# Altium PCB 404_PCB.PcbDoc
Units mm, origin at the board's own origin, x right, y up, seen from the top; angles counter-clockwise.
Board outline 150 x 150 mm, 4 copper layers (Top Layer, Plane(VCC), Plane(GROUND), Bottom Layer), stack 0.995 mm thick; 81 components, 119 nets, 430 pads, 21 vias.
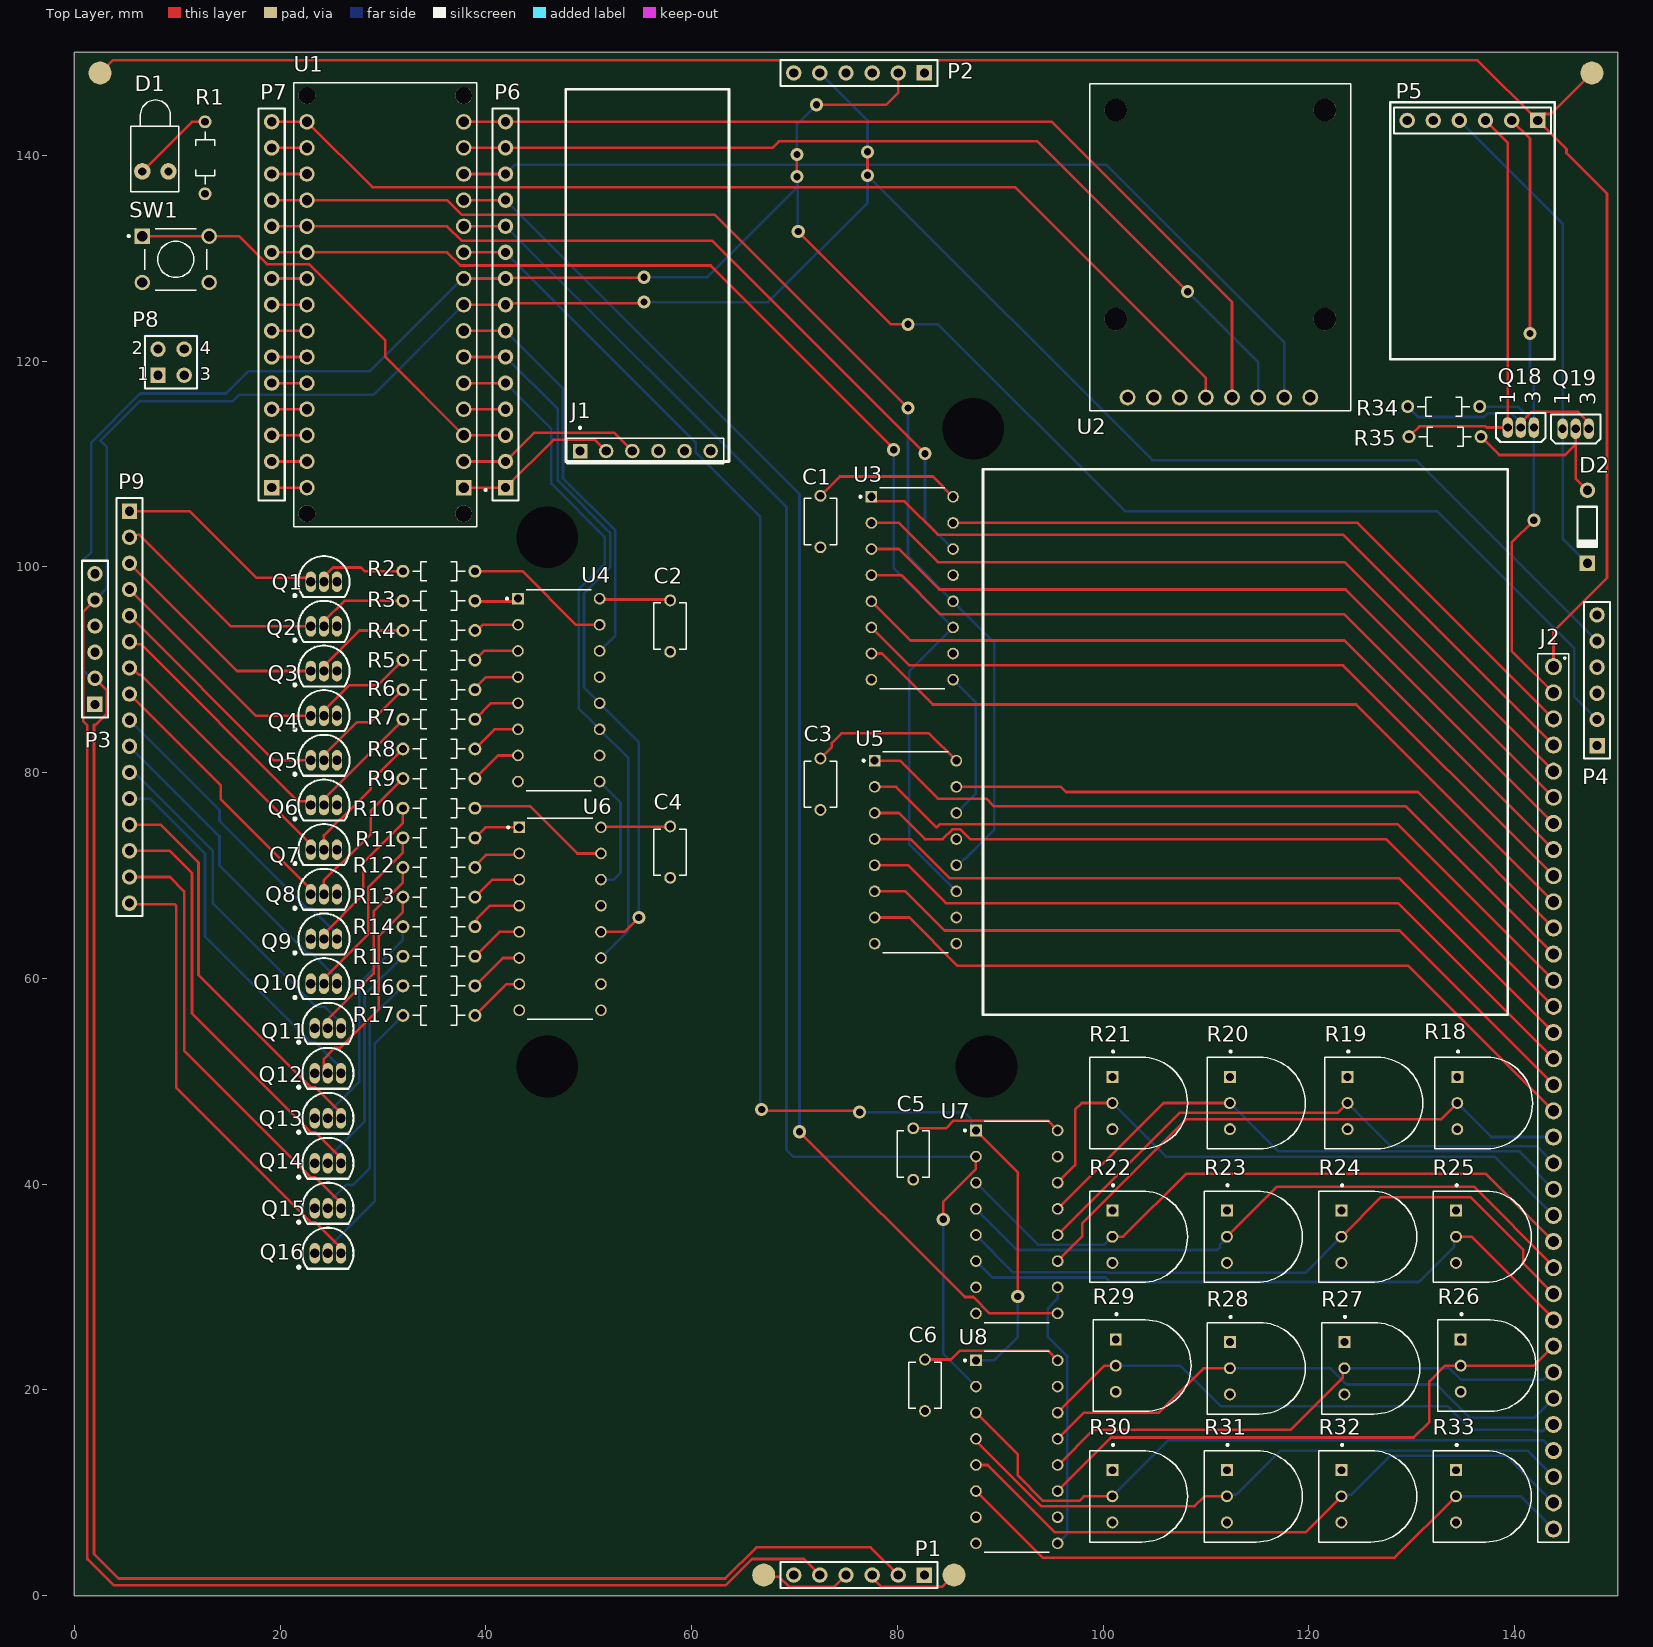
[diagram p0: Top Layer view]
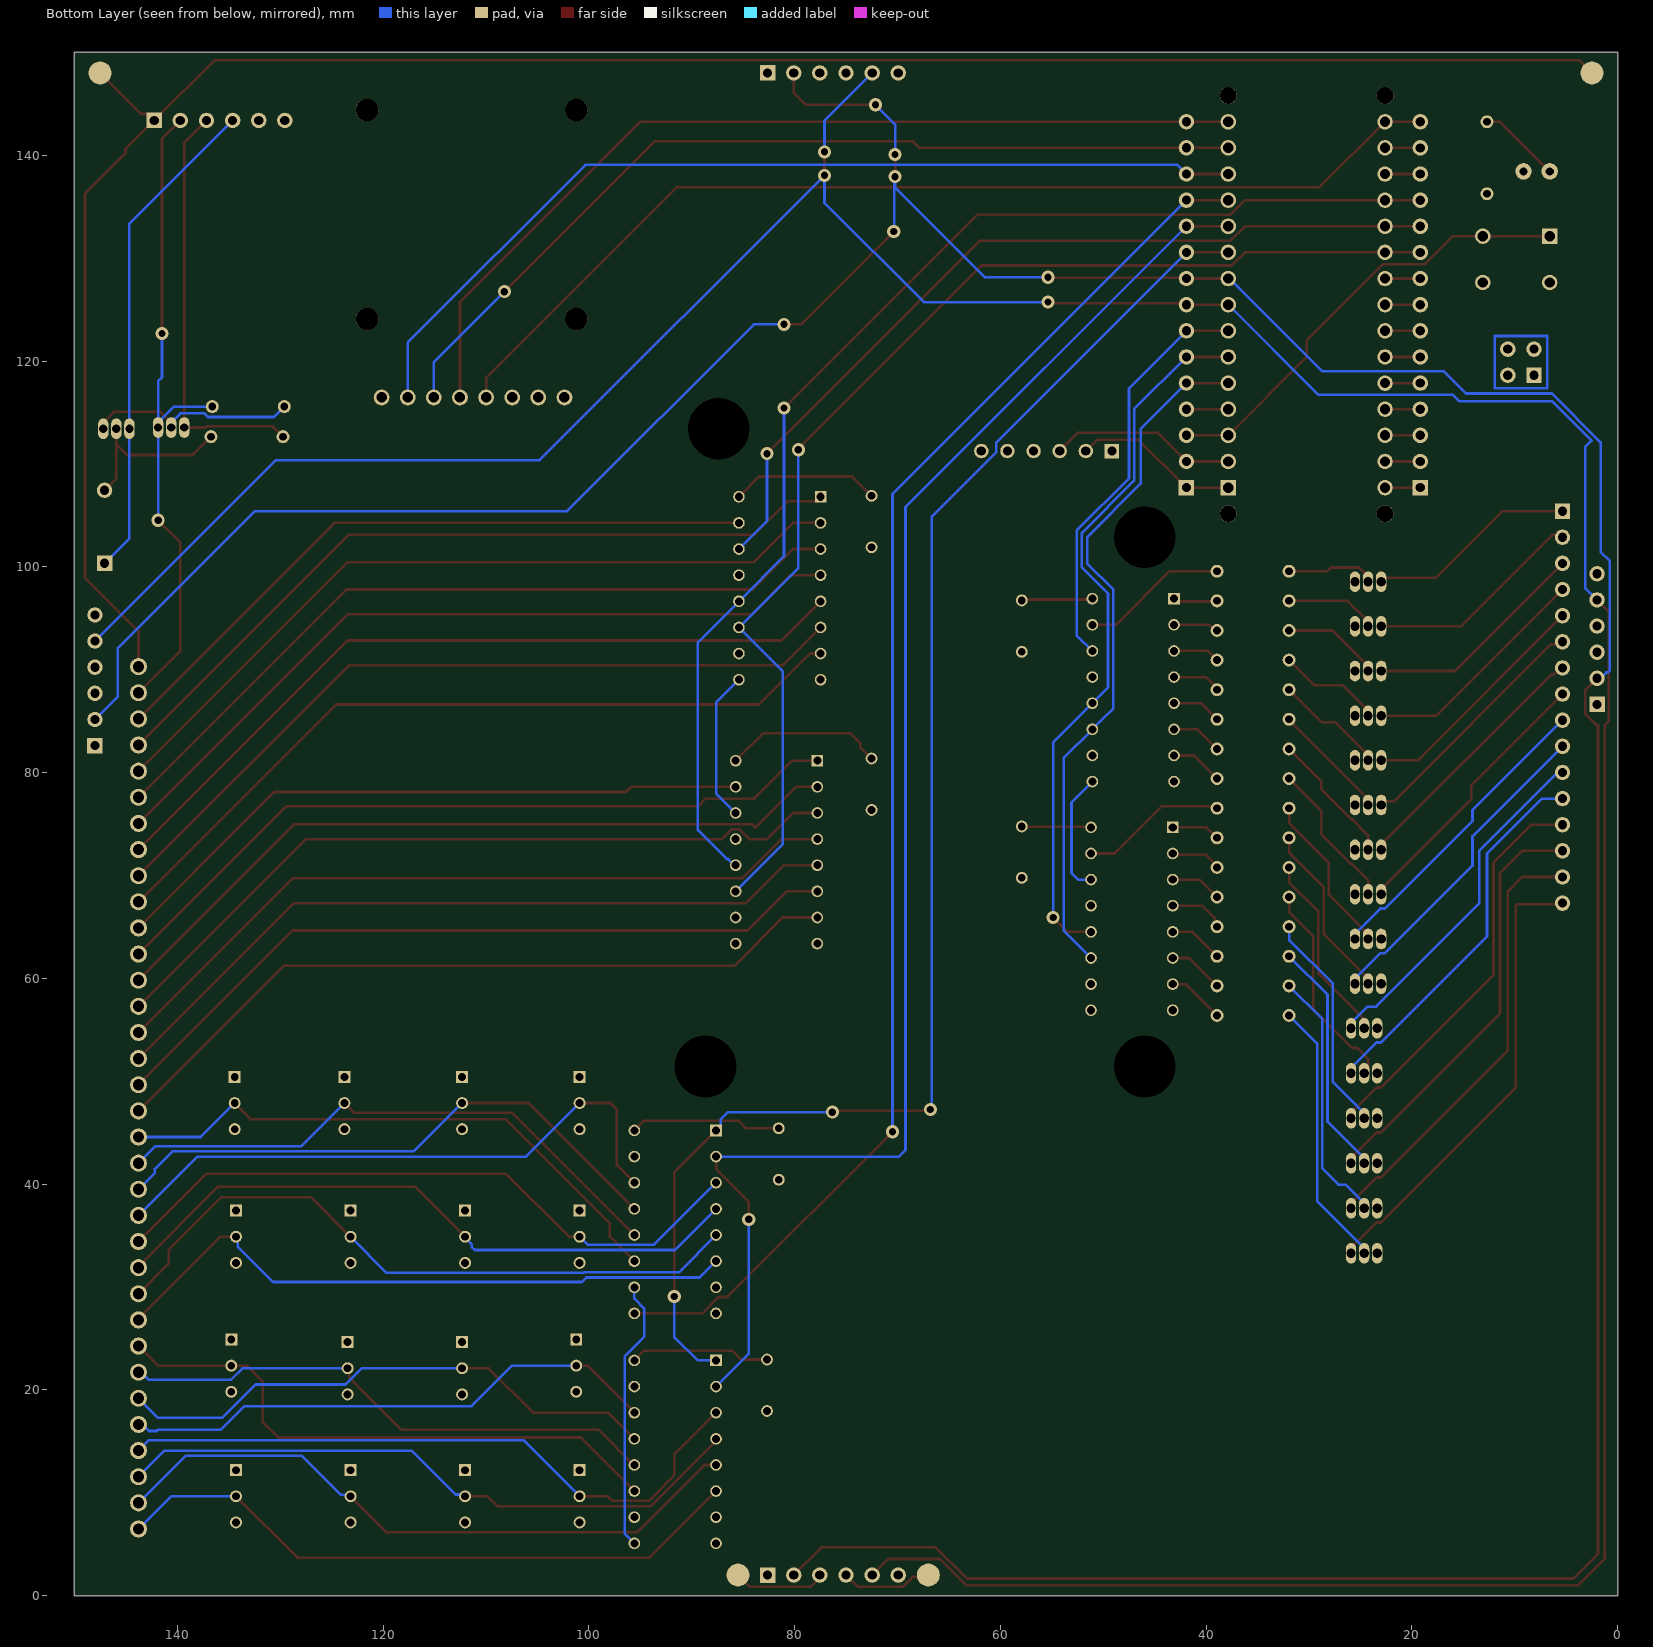
[diagram p1: Bottom Layer view, seen from below]
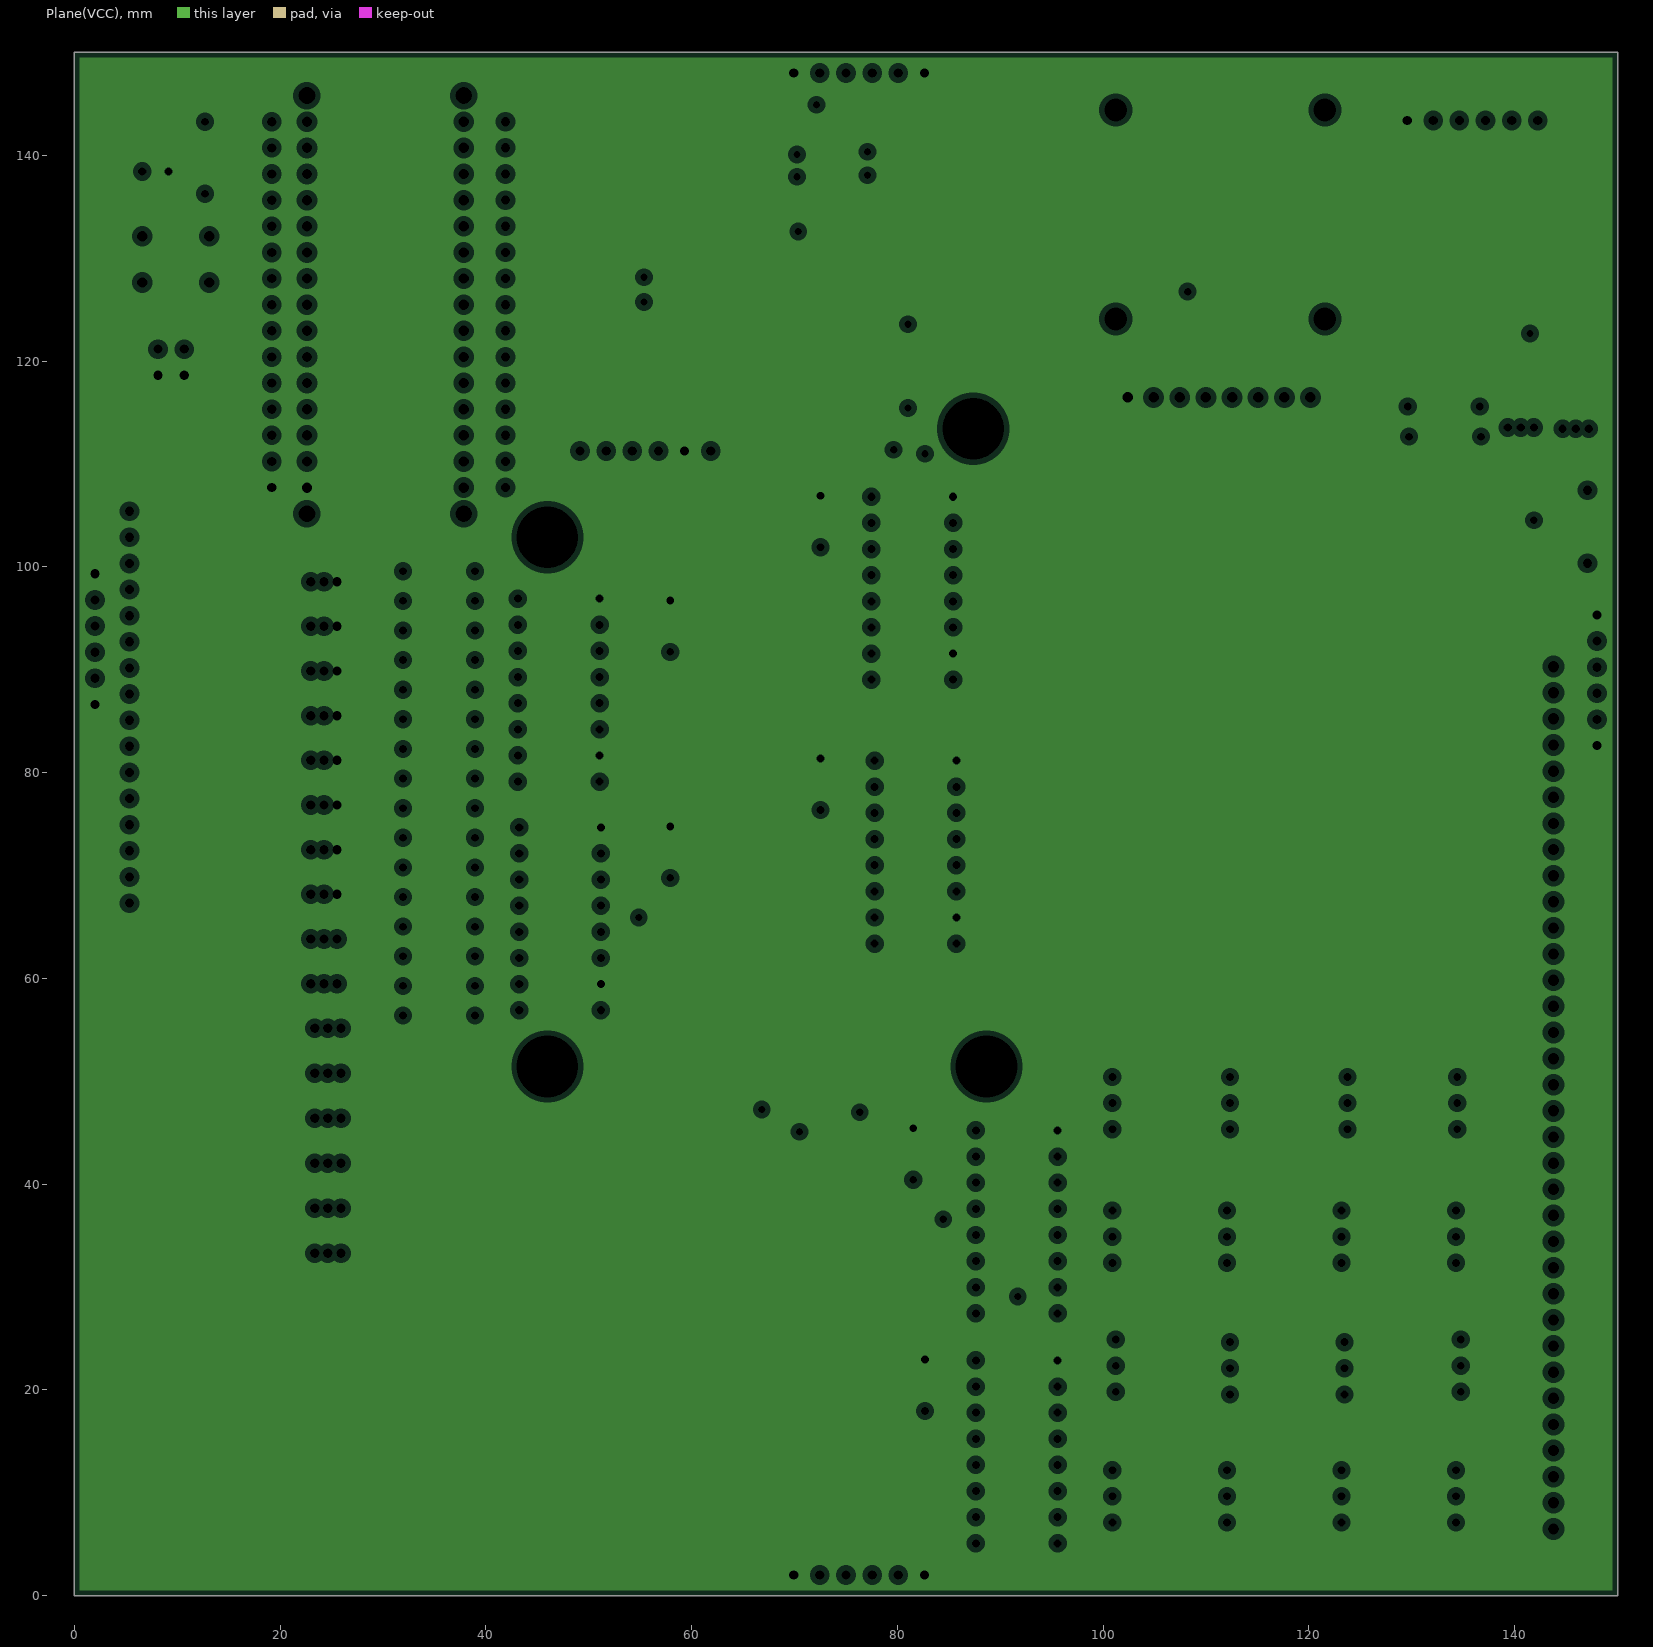
[diagram p2: Plane(VCC), clearances drawn from the general rule]
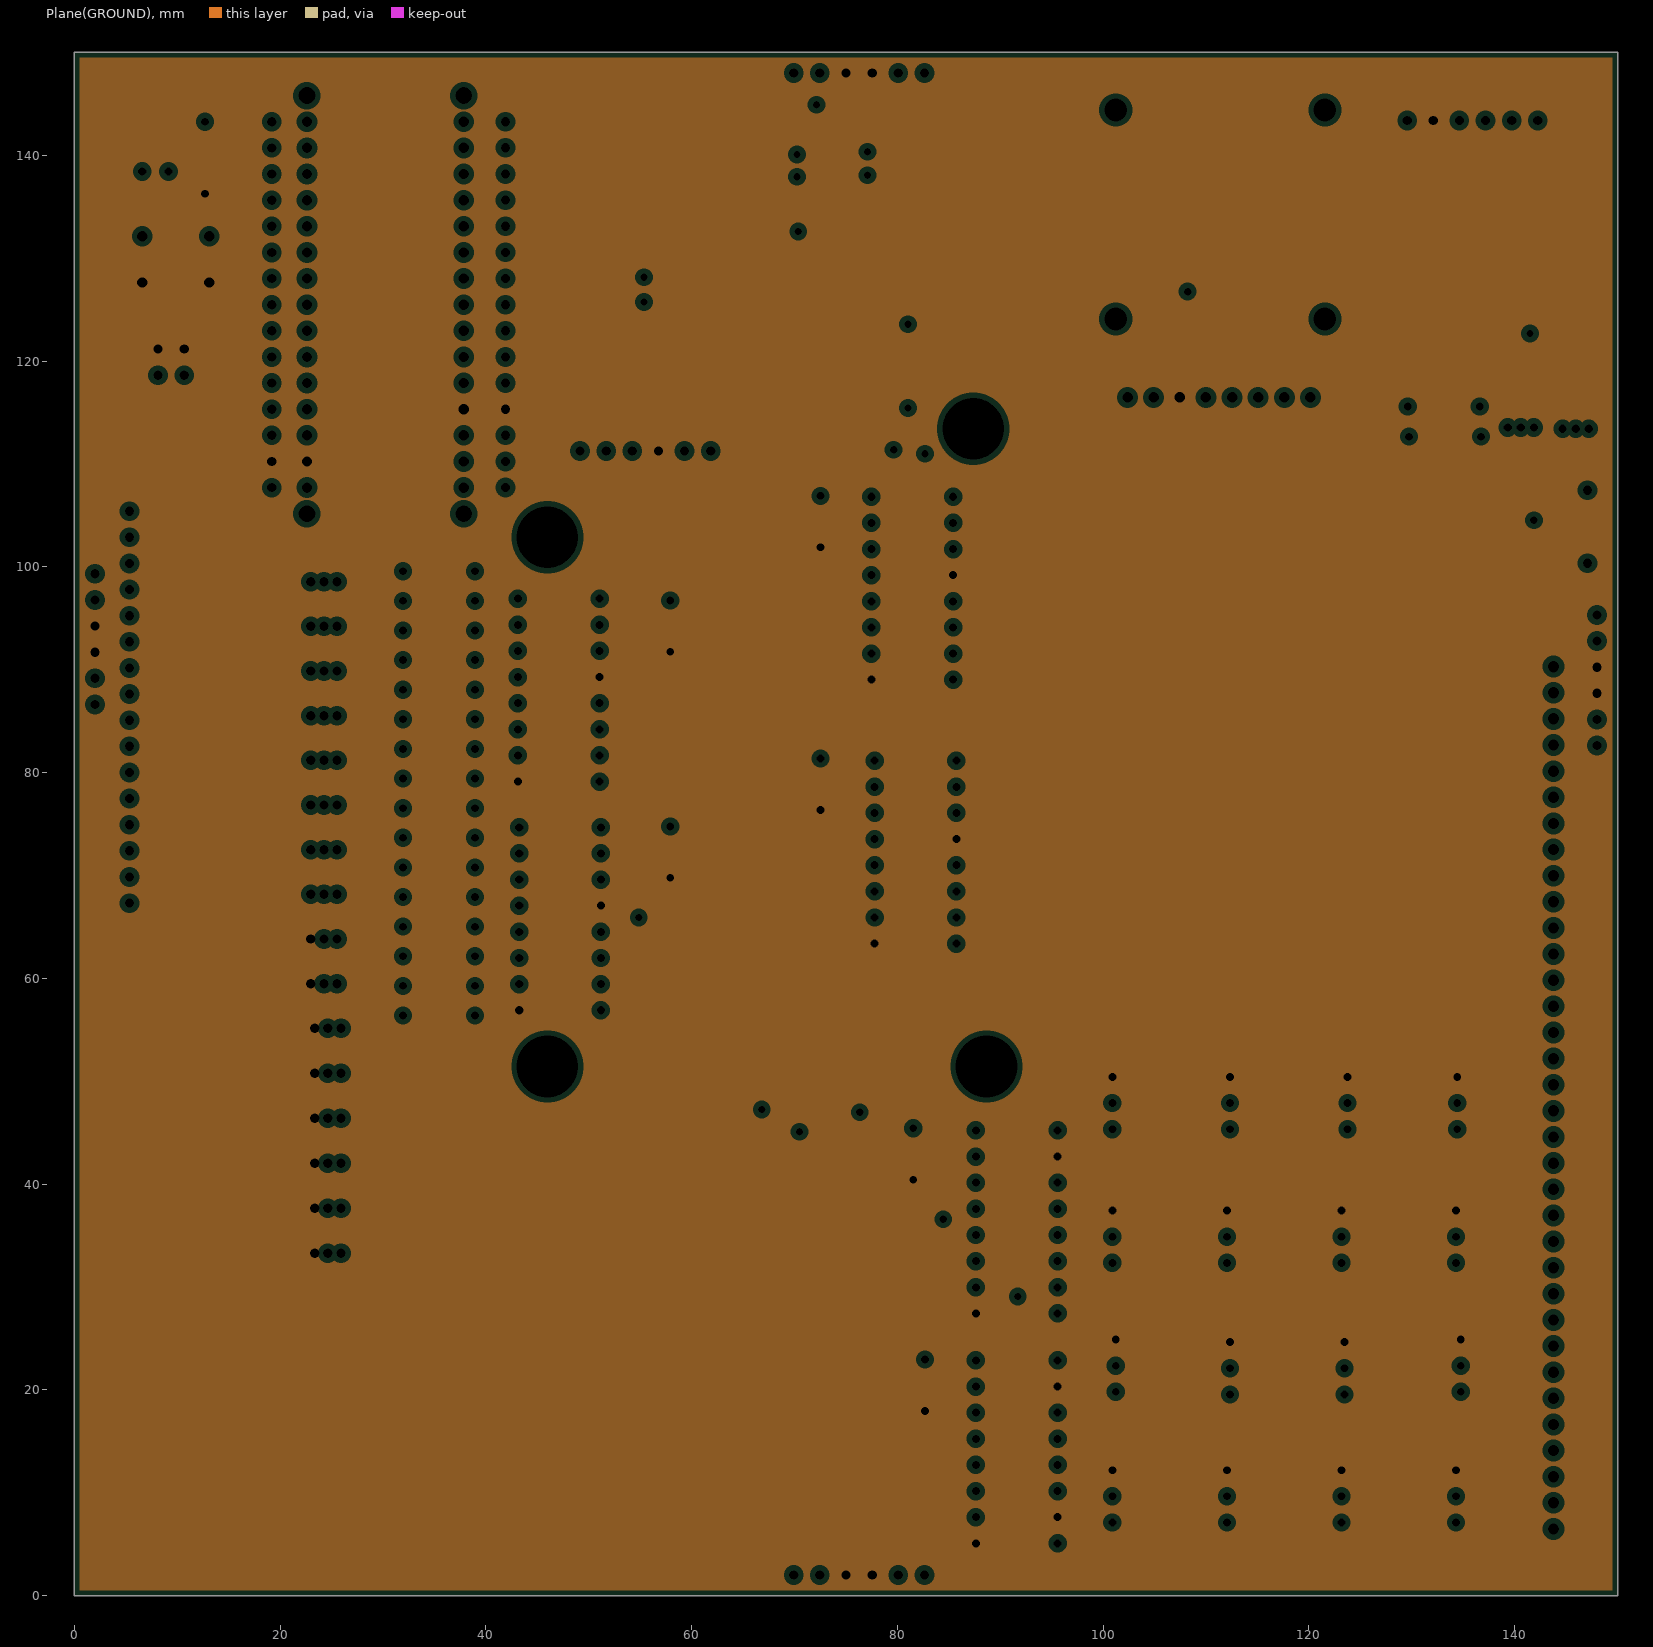
[diagram p3: Plane(GROUND), clearances drawn from the general rule]

## Layer stack, top to bottom
Top Solder: solder mask 0.0102, Solder Resist, Dk 3.5
Top Layer: signal copper 0.0356
Dielectric 2: prepreg 0.0711, PP-006, Dk 4.1
Plane(VCC): plane copper 0.035, net VCC
Dielectric 1: core 0.7112, FR-4, Dk 4.8
Plane(GROUND): plane copper 0.035, net GND
Dielectric 3: prepreg 0.0711, PP-006, Dk 4.1
Bottom Layer: signal copper 0.0356
Bottom Solder: solder mask 0.0102, Solder Resist, Dk 3.5

## Board outline
0,0 0,150 150,150 150,0

## Design rules (kind name [scope] priority, off if disabled: settings)
Clearance [All] p1: gap=0.254 ignorepadtopadclearanceinfootprint=FALSE except(0: Arc-Hole Track-Hole SMDPad-Hole THPad-Hole Via-Hole Fill-Hole Poly-Hole Region-Hole Text-Hole)
HoleSize [All] p1: absolutevalues=TRUE maxlimit=7 minlimit=0.025 maxpercent=80.000 minpercent=20.000
MinimumSolderMaskSliver [All] p1 off: minsoldermaskwidth=0.254
PlaneClearance [All] p1: clearance=0.508
PlaneConnect [All] p1: pad.planeconnectstyle=Relief pad.reliefexpansion=0.254 pad.reliefentries=4 pad.reliefconductorwidth=0.254 pad.reliefairgap=0.254 via.planeconnectstyle=Direct via.reliefexpansion=0.508 via.reliefentries=4 via.reliefconductorwidth=0.254 via.reliefairgap=0.254
PolygonConnect [All] p1: connectstyle=Relief reliefconductorwidth=0.254 reliefentries=4 polygonreliefangle="90 Angle" airgapwidth=0.254
RoutingVias [All] p1: holewidth=0.711 width=1.27 viastyle="Through Hole" minholewidth=0.711 minwidth=1.27 maxholewidth=0.711 maxwidth=1.27
SilkToSilkClearance [All] p1 off: silktosilkclearance=0.254
SilkToSolderMaskClearance [IsPad] p1 off: minsilkscreentomaskgap=0.254 clearancetoexposedcopper=TRUE
SolderMaskExpansion [All] p1: expansion=0.102 istentingtop=FALSE
Width [All] p1: maxlimit=0.254 minlimit=0.254 preferedwidth=0.254
24 further rules are at their usual default settings.

## Components (designator, comment, footprint, x,y, rotation, side; value= is the part's Value field where it differs from the comment)
C1 "0.1uF" CAP_RDER72H103K1K1H03B 72.517,104.394 r270 top
C2 "0.1uF" CAP_RDER72H103K1K1H03B 57.912,94.234 r270 top
C3 "0.1uF" CAP_RDER72H103K1K1H03B 72.517,78.867 r270 top
C4 "0.1uF" CAP_RDER72H103K1K1H03B 57.912,72.263 r270 top
C5 "0.1uF" CAP_RDER72H103K1K1H03B 81.534,42.926 r270 top
C6 "0.1uF" CAP_RDER72H103K1K1H03B 82.677,20.447 r270 top
D1 "LED1" LED-1 7.874,138.43 r90 top
D2 "Diode 1N4148" DO-35 147.066,103.886 r270 top
J1 "215297-6" TE_215297-6 55.499,111.252 r0 top
J2 "61303411021" 61303411021 143.764,48.387 r90 top
P1 "Header 6" HDR1X6 82.62,2 r180 top
P2 "Header 6" HDR1X6 82.62,148 r180 top
P3 "Header 6" HDR1X6 2,86.62 r90 top
P4 "Header 6" HDR1X6 148,82.62 r90 top
P5 "Header 6" HDR1X6 142.24,143.383 r180 top
P6 "Header 15" HDR1X15 41.91,107.7 r90 top
P7 "Header 15" HDR1X15 19.177,107.696 r90 top
P8 "Header 2X2" HDR2X2 8.128,118.618 r0 top
P9 "Header 16" HDR1X16 5.361,105.41 r270 top
Q1 "2N3904" TO-92A 24.257,98.552 r270 top
Q2 "2N3904" TO-92A 24.257,94.211 r270 top
Q3 "2N3904" TO-92A 24.257,89.87 r270 top
Q4 "2N3904" TO-92A 24.257,85.529 r270 top
Q5 "2N3904" TO-92A 24.257,81.188 r270 top
Q6 "2N3904" TO-92A 24.257,76.847 r270 top
Q7 "2N3904" TO-92A 24.257,72.505 r270 top
Q8 "2N3904" TO-92A 24.257,68.164 r270 top
Q9 "2N3904" TO-92A 24.257,63.823 r270 top
Q10 "2N3904" TO-92A 24.257,59.482 r270 top
Q11 "2N3904" TO-92A 24.638,55.141 r270 top
Q12 "2N3904" TO-92A 24.638,50.768 r270 top
Q13 "2N3904" TO-92A 24.638,46.394 r270 top
Q14 "2N3904" TO-92A 24.638,42.021 r270 top
Q15 "2N3904" TO-92A 24.638,37.647 r270 top
Q16 "2N3904" TO-92A 24.638,33.274 r270 top
Q18 "MOSFET-N" E3 140.589,113.538 r90 top
Q19 "MOSFET-P" E3 145.923,113.411 r90 top
R1 "470ohm" RESAD700W45L350D185 12.7,139.756 r90 top
R2 "390" RESAD700W45L350D185 35.433,99.568 r180 top
R3 "390" RESAD700W45L350D185 35.433,96.689 r180 top
R4 "390" RESAD700W45L350D185 35.433,93.811 r180 top
R5 "" RESAD700W45L350D185 35.433,90.932 r180 top
R6 "1-1623928-1" RESAD700W45L350D185 35.433,88.053 r180 top
R7 "1-1623928-1" RESAD700W45L350D185 35.433,85.175 r180 top
R8 "1-1623928-1" RESAD700W45L350D185 35.433,82.296 r180 top
R9 "1-1623928-1" RESAD700W45L350D185 35.433,79.417 r180 top
R10 "390" RESAD700W45L350D185 35.433,76.539 r180 top
R11 "390" RESAD700W45L350D185 35.433,73.66 r180 top
R12 "390" RESAD700W45L350D185 35.433,70.781 r180 top
R13 "" RESAD700W45L350D185 35.433,67.903 r180 top
R14 "1-1623928-1" RESAD700W45L350D185 35.433,65.024 r180 top
R15 "1-1623928-1" RESAD700W45L350D185 35.433,62.145 r180 top
R16 "1-1623928-1" RESAD700W45L350D185 35.433,59.267 r180 top
R17 "1-1623928-1" RESAD700W45L350D185 35.433,56.388 r180 top
R18 "3352T-1-103LF" TRIM_3352T-1-103LF 137.287,47.879 r270 top
R19 "3352T-1-103LF" TRIM_3352T-1-103LF 126.619,47.879 r270 top
R20 "3352T-1-103LF" TRIM_3352T-1-103LF 115.189,47.879 r270 top
R21 "3352T-1-103LF" TRIM_3352T-1-103LF 103.759,47.879 r270 top
R22 "3352T-1-103LF" TRIM_3352T-1-103LF 103.759,34.883 r270 top
R23 "3352T-1-103LF" TRIM_3352T-1-103LF 114.893,34.883 r270 top
R24 "3352T-1-103LF" TRIM_3352T-1-103LF 126.026,34.883 r270 top
R25 "3352T-1-103LF" TRIM_3352T-1-103LF 137.16,34.883 r270 top
R26 "3352T-1-103LF" TRIM_3352T-1-103LF 137.617,22.352 r270 top
R27 "3352T-1-103LF" TRIM_3352T-1-103LF 126.314,22.098 r270 top
R28 "3352T-1-103LF" TRIM_3352T-1-103LF 115.189,22.098 r270 top
R29 "3352T-1-103LF" TRIM_3352T-1-103LF 104.089,22.352 r270 top
R30 "3352T-1-103LF" TRIM_3352T-1-103LF 103.759,9.652 r270 top
R31 "3352T-1-103LF" TRIM_3352T-1-103LF 114.893,9.652 r270 top
R32 "3352T-1-103LF" TRIM_3352T-1-103LF 126.026,9.652 r270 top
R33 "3352T-1-103LF" TRIM_3352T-1-103LF 137.16,9.652 r270 top
R34 "390" RESAD700W45L350D185 133.096,115.57 r180 top
R35 "390" RESAD700W45L350D185 133.223,112.649 r0 top
SW1 "1825910-2" TE_1825910-2 6.604,132.135 r0 top
U1 "A000005" MODULE_A000005 30.226,125.476 r180 top
U2 "254" MODULE_254 111.379,131.064 r270 top
U3 "SN74HC595NE4" DIP794W45P254L1969H508Q16 81.44,97.917 r0 top
U4 "SN74HC595NE4" DIP794W45P254L1969H508Q16 47.084,88.011 r0 top
U5 "SN74HC595NE4" DIP794W45P254L1969H508Q16 81.755,72.263 r0 top
U6 "SN74HC595NE4" DIP794W45P254L1969H508Q16 47.211,65.786 r0 top
U7 "SN74HC165N" DIP794W45P254L1969H508Q16 91.6,36.322 r0 top
U8 "SN74HC165N" DIP794W45P254L1969H508Q16 91.6,13.97 r0 top

## Footprints (in the part's own frame and the unit in brackets; to place one, negate y for a bottom-side part, rotate by r counter-clockwise, add the part's x,y. Pads: shape width x height; smd on the part's side, far side on the other; paste and mask are expansions set on the pad)
61303411021 [mm]
  round 1.65 hole 1.1: 1(41.91,0) 2(39.37,0) 3(36.83,0) 4(34.29,0) 5(31.75,0) 6(29.21,0) 7(26.67,0) 8(24.13,0) 9(21.59,0) 10(19.05,0) 11(16.51,0) 12(13.97,0) 13(11.43,0) 14(8.89,0) 15(6.35,0) 16(3.81,0) 17(1.27,0) 18(-1.27,0) 19(-3.81,0) 20(-6.35,0) 21(-8.89,0) 22(-11.43,0) 23(-13.97,0) 24(-16.51,0) 25(-19.05,0) 26(-21.59,0) 27(-24.13,0) 28(-26.67,0) 29(-29.21,0) 30(-31.75,0) 31(-34.29,0) 32(-36.83,0) 33(-39.37,0) 34(-41.91,0)
  silkscreen extent -43.18,-1.5 43.18,1.52
CAP_RDER72H103K1K1H03B [mm]
  round 1.15 hole 0.75: 1(-2.5,0) 2(2.5,0)
  silkscreen extent -2.25,-1.58 2.25,1.58, body extent -2.75,-1.58 2.75,1.58, height 5
DIP794W45P254L1969H508Q16 [mm]
  rect 1.13x1.13 hole 0.78: 1(-3.97,8.89)
  round 1.13 hole 0.78: 2(-3.97,6.35) 3(-3.97,3.81) 4(-3.97,1.27) 5(-3.97,-1.27) 6(-3.97,-3.81) 7(-3.97,-6.35) 8(-3.97,-8.89) 9(3.97,-8.89) 10(3.97,-6.35) 11(3.97,-3.81) 12(3.97,-1.27) 13(3.97,1.27) 14(3.97,3.81) 15(3.97,6.35) 16(3.97,8.89)
  silkscreen extent -5.13,-9.77 3.17,9.77, body extent -5.71,-9.53 5.21,9.78, height 5.08
DO-35 [mm] "Diode, Axial; Body 3.8 x 1.9 mm (LxDia. max), Lead Dia. 0.53 mm (max)"
  round 1.5 hole 0.9: 1(-3.55,0)
  rect 1.5x1.5 hole 0.9: 2(3.55,0)
  silkscreen extent -1.95,-0.95 2.05,0.95
E3 [mm] "TO, Flat Index; 3 In-Line, Axial Leads; Body Dia. 4.6mm; Lead Dia. 0.5 mm (max)"
  oval 2x1 hole 0.8: 1(0,1.27) 2(0,0) 3(0,-1.27)
  silkscreen extent -1.41,-2.41 1.41,2.41
HDR1X6 [mm] "Connector; Header; 6 Position"
  rect 1.5x1.5 hole 0.9: 1(0,0)
  round 1.5 hole 0.9: 2(2.54,0) 3(5.08,0) 4(7.62,0) 5(10.16,0) 6(12.7,0)
  silkscreen extent -1.27,-1.27 13.97,1.27
HDR1X15 [mm] "Connector; Header; 15 Position"
  rect 1.5x1.5 hole 0.9: 1(0,0)
  round 1.5 hole 0.9: 2(2.54,0) 3(5.08,0) 4(7.62,0) 5(10.16,0) 6(12.7,0) 7(15.24,0) 8(17.78,0) 9(20.32,0) 10(22.86,0) 11(25.4,0) 12(27.94,0) 13(30.48,0) 14(33.02,0) 15(35.56,0)
  silkscreen extent -1.27,-1.27 36.83,1.27
HDR1X16 [mm] "Connector; Header; 16 Position"
  rect 1.5x1.5 hole 0.9: 1(0,0)
  round 1.5 hole 0.9: 2(2.54,0) 3(5.08,0) 4(7.62,0) 5(10.16,0) 6(12.7,0) 7(15.24,0) 8(17.78,0) 9(20.32,0) 10(22.86,0) 11(25.4,0) 12(27.94,0) 13(30.48,0) 14(33.02,0) 15(35.56,0) 16(38.1,0)
  silkscreen extent -1.27,-1.27 39.37,1.27
HDR2X2 [mm] "Connector; Header; 2x2 Position"
  rect 1.5x1.5 hole 0.9: 1(0,0)
  round 1.5 hole 0.9: 2(0,2.54) 3(2.54,0) 4(2.54,2.54)
  silkscreen extent -1.27,-1.27 3.81,3.81
LED-1 [mm] "LED; 2 Leads"
  round 1.6 hole 0.8: 1(0,1.27) 2(0,-1.27)
  silkscreen extent -2,-2.29 6.95,2.41
MODULE_254 [mm]
  round 1.53 hole 1.02: 3V(14.605,-6.477) 5V(14.605,-9.017) CD(14.605,8.763) CLK(14.605,-1.397) CS(14.605,6.223) DI(14.605,3.683) DO(14.605,1.143) GND(14.605,-3.937)
  round 2.2 hole 2.2 unplated: ""(-13.335,10.16) ""(-13.335,-10.16) ""(6.985,10.16) ""(6.985,-10.16)
  silkscreen extent -15.88,-12.7 15.88,12.7
MODULE_A000005 [mm]
  rect 1.508x1.508 hole 1: 1(-7.62,17.78)
  round 1.508 hole 1: 2(-7.62,15.24) 3(-7.62,12.7) 4(-7.62,10.16) 5(-7.62,7.62) 6(-7.62,5.08) 7(-7.62,2.54) 8(-7.62,0) 9(-7.62,-2.54) 10(-7.62,-5.08) 11(-7.62,-7.62) 12(-7.62,-10.16) 13(-7.62,-12.7) 14(-7.62,-15.24) 15(-7.62,-17.78) 16(7.62,-17.78) 17(7.62,-15.24) 18(7.62,-12.7) 19(7.62,-10.16) 20(7.62,-7.62) 21(7.62,-5.08) 22(7.62,-2.54) 23(7.62,0) 24(7.62,2.54) 25(7.62,5.08) 26(7.62,7.62) 27(7.62,10.16) 28(7.62,12.7) 29(7.62,15.24) 30(7.62,17.78)
  round 1.651 hole 1.651 unplated: ""(-7.62,20.32) ""(-7.62,-20.32) ""(7.62,20.32) ""(7.62,-20.32)
  silkscreen extent -9.85,-21.59 8.89,21.59
RESAD700W45L350D185 [mm]
  round 1.258 hole 0.75: 1(-3.5,0) 2(3.5,0)
  silkscreen extent -2.55,-0.92 2.55,0.92
TE_215297-6 [mm]
  rect 1.408x1.408 hole 0.9: 1(-6.35,0)
  round 1.408 hole 0.9: 2(-3.81,0) 3(-1.27,0) 4(1.27,0) 5(3.81,0) 6(6.35,0)
  silkscreen extent -7.62,-1.26 7.62,2.36
TE_1825910-2 [mm]
  rect 1.498x1.498 hole 0.99: 1(0,0)
  round 1.498 hole 0.99: 2(6.5,0) 3(0,-4.5) 4(6.5,-4.5)
  silkscreen extent -1.42,-5.25 6.24,0.74
TO-92A [mm] "TO, Flat Index; 3 In-Line, Axial Leads; Body Dia. 4.5mm; Leads 0.51 x 0.48 mm (max)"
  oval 2x1 hole 0.9: 1(0,-1.27) 2(0,0) 3(0,1.27)
  silkscreen extent -2.48,-2.95 1.5,2.48, body extent -2.48,-2.5 1.5,2.5, height 6.86
TRIM_3352T-1-103LF [mm]
  rect 1.16x1.16 hole 0.76: 1(-2.54,-2.87)
  round 1.16 hole 0.76: 2(0,-2.87) 3(2.54,-2.87)
  silkscreen extent -5.1,-5.08 4.45,4.44, body extent -1,-0.63 1,0.63, height 0.8

## Part data
C1 C2 C3 C4 C5 C6: library part RDER72H103K1K1H03B, "Cap Ceramic 0.0047uF 50V C0G 5% Radial 5mm 125C Bulk", Package=None, Availability=Unavailable, MF="{'manufacturer': u'Murata'}", MP=RDER72H103K1K1H03B, Price=None
D1: "Typical RED GaAs LED", LatestRevisionDate=08-Jul-2005, LatestRevisionNote="Mech Layer 1 removed.", PackageDescription="LED; 2 Leads", PackageReference=LED-1, Published=8-Jun-2000, Publisher="Altium Limited"
D2: "High Conductance Fast Diode", Code_JEDEC=DO-204-AH, ComponentLink1Description="Manufacturer Link", ComponentLink1URL=http://www.fairchildsemi.com/, ComponentLink2Description=Datasheet, ComponentLink2URL=http://www.fairchildsemi.com/ds/1N%2F1N4148.pdf, DatasheetVersion=1997, LatestRevisionDate=17-Jul-2002, LatestRevisionNote="Re-released for DXP Platform.", PackageDescription="Diode, Axial; Body 3.8 x 1.9 mm (LxDia. max), Lead Dia. 0.53 mm (max)", PackageReference=DO-35, Published=8-Jun-2000, Publisher="Altium Limited"
J1 U3 U4 U5 U6 U7 U8: Package=None, Availability=Unavailable, Price=None
  J1: MF="{'manufacturer': u'TE Connectivity'}", MP=215297-6
  U3 U4 U5 U6: MF="{'manufacturer': u'Texas Instruments'}", MP=SN74HC595NE4
  U7 U8: MF="{'manufacturer': u'Texas Instruments'}", MP=SN74HC165N
J2: "<b> WR-PHD 2.54mm Angled Pin Header, 34 Pins/<b>=>Con_BTB_PHD_2.54_1_THT_61303411021 <br><a href=\"http://katalog.we-online.de/media/images/eican/Con_BTB_PHD_2.54_1_THT_61303211021_pf2.jpg\" title=\"Enlarge picture\"> <img src=\"http://katalog.we-online.de/media/thumbs2/eican/thb_Con_BTB_PHD_2.54_1_THT_61303211021_pf2.jpg\" width=\"320\"></a><p> Details see: <a href=\"http://katalog.we-online.de/en/em/613_0xx_110_21\">http://katalog.we-online.de/en/em/613_0xx_110_21</a><p> Created 2014-05-29, Karrer Zheng<br> 2014 (C) WÃ¼rth Elektronik", Package=None, Availability=Unavailable, MF="{'manufacturer': u'W\xfcrth Elektronik'}", MP=61303411021, Price=None
P1 P2 P3 P4 P5: "Header, 6-Pin", LatestRevisionDate=17-Jul-2002, LatestRevisionNote="Re-released for DXP Platform.", Publisher="Altium Limited"
P6 P7: "Header, 15-Pin", LatestRevisionDate=17-Jul-2002, LatestRevisionNote="Re-released for DXP Platform.", Publisher="Altium Limited"
P8: "Header, 2-Pin, Dual row", LatestRevisionDate=17-Jul-2002, LatestRevisionNote="Re-released for DXP Platform.", Publisher="Altium Limited"
P9: "Header, 16-Pin", LatestRevisionDate=17-Jul-2002, LatestRevisionNote="Re-released for DXP Platform.", Publisher="Altium Limited"
Q1 Q2 Q3 Q4 Q5 Q6 Q7 Q8 Q9 Q10 Q11 Q12 Q13 Q14 Q15 Q16: "NPN General Purpose Amplifier", ComponentLink1Description="Manufacturer Link", ComponentLink1URL=http://www.fairchildsemi.com/, ComponentLink2Description=Datasheet, ComponentLink2URL=http://www.fairchildsemi.com/ds/2N%2F2N3904.pdf, DatasheetVersion=1997, LatestRevisionDate=15-Jan-2003, LatestRevisionNote="PCB Footprint 'BCY-W3/D4.7' replaced", PackageDescription="TO, Flat Index; 3 In-Line, Axial Leads; Body Dia. 4.5mm; Leads 0.51 x 0.48 mm (max)", PackageReference=TO-92A, PackageVersion=Sep-1998, Published=8-Jun-2000, Publisher="Altium Limited"
Q18: "N-Channel MOSFET", LatestRevisionDate=17-Jul-2002, LatestRevisionNote="Re-released for DXP Platform.", PackageDescription="TO, Flat Index; 3 In-Line, Axial Leads; Body Dia. 4.6mm; Lead Dia. 0.5 mm (max)", PackageReference=E3, PackageVersion=1995/1996, Published=8-Jun-2000, Publisher="Altium Limited"
Q19: "P-Channel MOSFET", LatestRevisionDate=17-Jul-2002, LatestRevisionNote="Re-released for DXP Platform.", PackageDescription="TO, Flat Index; 3 In-Line, Axial Leads; Body Dia. 4.6mm; Lead Dia. 0.5 mm (max)", PackageReference=E3, PackageVersion=1995/1996, Published=8-Jun-2000, Publisher="Altium Limited"
R1: library part 2-1623928-5, "CFR16 5% 10K 470 ohm", Package=None, Availability=Unavailable, MF="{'manufacturer': u'TE Connectivity'}", MP=2-1623928-5, Price=None
R2 R3 R4 R5 R10 R11 R12 R13 R34 R35: library part 1-1623928-1, "CFR16 5% 10K", Package=None, Availability=Unavailable, MF="{'manufacturer': u'TE Connectivity'}", MP=1-1623928-1, Price=None
R6 R7 R8 R9 R14 R15 R16 R17: "CFR16 5% 10K", Package=None, Availability=Unavailable, MF="{'manufacturer': u'TE Connectivity'}", MP=1-1623928-1, Price=None
R18 R19 R20 R21 R22 R23 R24 R25 R26 R27 R28 R29 R30 R31 R32 R33: "10 kOhms 0.5W, 1/2W Through Hole Thumbwheel Potentiometer Top Adjustment", Package=None, Availability=Unavailable, MF="{'manufacturer': u'Bourns'}", MP=3352T-1-103LF, Price=None
SW1: "SWITCH TACTILE SPST-NO 0.05A 24V", Package=None, Availability=Unavailable, MF="{'manufacturer': u'TE Connectivity'}", MP=1825910-2, Price=None
U1: "CLOCK SAW OSCILLATOR SEAM7050 T&", Package=None, Availability=Unavailable, MF="{'manufacturer': u'Arduino'}", MP=A000005, Price=None
U2: "MICROSD CARD BREAKOUT 5V OR 3V", Package=None, Availability=Unavailable, MF="{'manufacturer': u'Adafruit'}", MP=254, Price=None

## Free pads (board coordinates)
  round 2.2 hole 6: 3(45.974,51.435) 3(45.974,102.87) 3(87.376,113.411) 3(88.646,51.435)
  round 2.235 all layers, no hole: 5(2.5,148) 5(67,2) 5(85.5,2) 5(147.5,148)

## Via types
v1: diameter 1.27, hole 0.711, Top Layer to Bottom Layer, 21 vias

## Nets (pads, with @x,y where several pads share a name; then routed paths per layer and width w, separated by ;. In a path a pad name is that pad's centre, name@x,y a point inside that pad or via, vN(x,y) a via of type N, cw(c..) or ccw(c..) an arc to the next point about the centre after c; other vN are vias at no path point)
2COL0: R17.1 U6.7 | length 5.6
  Top Layer w0.254: R17.1 41.981,59.436 U6.7
2COL1: R16.1 U6.6 | length 5.6
  Top Layer w0.254: R16.1 41.642,61.976 U6.6 ; R16.1@38.933,59.309 R16.1@38.933,59.507
2COL2: R15.1 U6.5 | length 5.5
  Top Layer w0.254: R15.1 41.304,64.516 U6.5 ; R15.1@38.933,62.23 R15.1@38.933,62.428
2COL3: R14.1 U6.4 | length 5.5
  Top Layer w0.254: R14.1 39.125,65.216 39.125,65.795 40.386,67.056 U6.4
2COL4: R13.1 U6.3 | length 5
  Top Layer w0.254: R13.1 40.626,69.596 U6.3
2COL5: R12.1 U6.2 | length 5.1
  Top Layer w0.254: R12.1@38.933,70.485 R12.1@39.091,70.485 ; R12.1 38.933,70.937 40.005,72.009 43.114,72.009 U6.2
2COL6: R11.1 U6.1 | length 5
  Top Layer w0.254: R11.1@38.933,73.152 R11.1@39.205,73.152 ; R11.1 39.949,74.676 U6.1
2COL7: R10.1 U6.15 | length 14.2
  Top Layer w0.254: R10.1 39.102,76.708 44.323,76.708 48.895,72.136 U6.15
2ROW0: R2.1 U4.15 | length 14.3
  Top Layer w0.254: R2.1 43.561,99.568 48.768,94.361 U4.15
2ROW1: R3.1 U4.1 | length 4.3
  Top Layer w0.254: R3.1@38.933,96.629 42.842,96.629 U4.1
2ROW2: R4.1 U4.2 | length 4.5
  Top Layer w0.254: R4.1@38.933,93.69 R4.1@39.019,93.69 ; R4.1 39.14,93.811 39.69,94.361 U4.2
2ROW3: R5.1 U4.3 | length 4.5
  Top Layer w0.254: R5.1 39.822,91.821 U4.3
2ROW4: R6.1 U4.4 | length 5
  Top Layer w0.254: R6.1@38.933,87.811 R6.1 38.933,88.209 40.005,89.281 U4.4
2ROW5: R7.1 U4.5 | length 4.8
  Top Layer w0.254: R7.1 40.499,86.741 U4.5
2ROW6: R8.1 U4.6 | length 5
  Top Layer w0.254: R8.1 40.838,84.201 U4.6
2ROW7: R9.1 U4.7 | length 5.1
  Top Layer w0.254: R9.1 41.177,81.661 U4.7
17: P7.14 U1.17 | length 3.4
  Top Layer w0.254: P7.14 U1.17
18: P7.13 U1.18 | length 3.4
  Top Layer w0.254: P7.13 U1.18
22: P7.9 U1.22 | length 3.4
  Top Layer w0.254: P7.9 U1.22
23: P7.8 U1.23 | length 3.4
  Top Layer w0.254: P7.8 U1.23
24: P7.7 U1.24 | length 3.4
  Top Layer w0.254: P7.7 U1.24
25: P7.6 U1.25 | length 3.4
  Top Layer w0.254: P7.6 U1.25
26: P7.5 U1.26 | length 3.4
  Top Layer w0.254: P7.5 U1.26
27: P7.4 U1.27 | length 3.4
  Top Layer w0.254: P7.4 U1.27
28: P7.3 U1.28 | length 3.4
  Top Layer w0.254: P7.3 U1.28
A1: J2.19 R18.2 U7.11 | length 56.7
  Top Layer w0.254: U7.11 97.944,34.886 97.944,36.177 108.068,46.3 132.838,46.3 R18.2
  Bottom Layer w0.254: R18.2 137.719,44.577 J2.19
A2: J2.27 R26.2 U8.11 | length 56.3
  Top Layer w0.254: U8.11 100.777,15.367 130.175,15.367 131.699,16.891 131.699,20.828 133.223,22.352 R26.2 141.859,22.352 J2.27
B1: J2.20 R19.2 U7.12 | length 55.9
  Top Layer w0.254: U7.12 107.436,46.918 122.788,46.918 R19.2
  Bottom Layer w0.254: R19.2 127.94,43.688 142.113,43.688 J2.20
B2: J2.28 R27.2 U8.12 | length 53.3
  Top Layer w0.254: U8.12 95.631,12.7 99.06,16.129 118.237,16.129 123.271,21.163 123.271,21.925 R27.2
  Bottom Layer w0.254: R27.2 133.642,22.098 134.752,20.988 142.788,20.988 143.517,21.717 J2.28
BAT: D2.2 P5.4 Q19.1 | length 48.2
  Bottom Layer w0.254: P5.4 144.653,133.35 Q19.1 144.653,102.749 D2.2
BAT_GND: P5.3 Q18.1 R35.1 | length 40.8
  Top Layer w0.254: R35.1 129.794,112.649 129.921,112.776 129.921,112.847 130.733,113.659 137.141,113.659 137.262,113.538 Q18.1 139.319,141.224 P5.3
C0: Q16.2 R17.2 | length 26.1
  Bottom Layer w0.254: Q16.2 24.638,33.774 29.21,38.346 29.21,53.665 R17.2
C1: Q15.2 R16.2 | length 25
  Bottom Layer w0.254: Q15.2 24.638,38.147 26.445,39.954 27.127,39.954 28.702,41.529 28.702,56.036 R16.2
C2: Q14.2 R15.2 | length 23.1
  Bottom Layer w0.254: Q14.2 24.638,42.521 28.194,46.077 28.194,58.406 R15.2
C3: Q13.2 R14.2 | length 21.7
  Bottom Layer w0.254: Q13.2 24.638,46.894 27.686,49.942 27.686,59.498 31.933,63.745 R14.2
C4: Q12.2 R13.2 | length 20.6
  Top Layer w0.254: Q12.2@24.257,50.8 24.257,52.181 25.305,53.229 25.797,53.229 29.594,57.026 29.594,64.114 31.933,66.452 R13.2
C5: Q11.2 R12.2 | length 18.8
  Top Layer w0.254: Q11.2@24.257,55.141 24.257,55.641 29.086,60.47 29.086,66.484 31.933,69.331 R12.2
C6: Q10.2 R11.2 | length 17.4
  Top Layer w0.254: Q10.2 24.257,59.982 28.578,64.303 28.578,68.855 31.933,72.21 R11.2
C7: Q9.2 R10.2 | length 15.9
  Top Layer w0.254: Q9.2 24.257,64.323 28.07,68.137 28.07,71.226 31.933,75.088 R10.2
CHAR_GND: J2.2 P5.2 Q18.3 R34.1 | length 65.2
  Top Layer w0.254: P5.2 141.478,141.605 v1(141.478,122.682) ; Q18.3 Q18.3@141.986,113.538 ; v1@141.986,104.521 v1(141.859,104.521) 139.7,102.362 139.7,91.821 J2.2
  Bottom Layer w0.254: R34.1 140.327,115.57 Q18.3@141.859,114.038 ; v1(141.478,122.682) 141.478,118.417 141.859,118.036 Q18.3@141.859,114.038 ; v1(141.859,104.521) Q18.3 Q18.3@141.859,114.038
COL0: P9.16 Q16.3 | length 45.3
  Top Layer w0.254: P9.16 5.488,67.183 9.757,67.183 9.906,67.034 9.906,49.363 23.003,36.266 23.416,36.266 25.908,33.774 Q16.3
  Bottom Layer w0.254: P9.16@5.361,67.264 P9.16
COL1: P9.15 Q15.3 | length 43.4
  Top Layer w0.254: P9.15 9.271,69.85 10.668,68.453 10.668,52.975 23.003,40.64 23.416,40.64 25.908,38.147 Q15.3
  Bottom Layer w0.254: P9.15@5.361,69.68 P9.15
COL2: P9.14 Q14.3 | length 41.4
  Top Layer w0.254: P9.14 9.271,72.39 11.43,70.231 11.43,56.586 23.003,45.013 23.416,45.013 25.908,42.521 Q14.3
COL3: P9.13 Q13.3 | length 39.1
  Top Layer w0.254: P9.13 8.382,74.93 12.065,71.247 12.065,60.325 23.003,49.387 23.416,49.387 25.908,46.894 Q13.3
COL4: P9.12 Q12.3 | length 36.6
  Bottom Layer w0.254: P9.12 7.366,77.47 12.7,72.136 12.7,64.063 23.003,53.76 23.416,53.76 25.908,51.268 Q12.3
COL5: P9.11 Q11.3 | length 34.1
  Bottom Layer w0.254: P9.11 5.599,79.772 6.08,79.772 13.462,72.39 13.462,67.261 23.478,57.245 24.304,57.245 25.908,55.641 Q11.3
COL6: P9.10 Q10.3 | length 31.7
  Bottom Layer w0.254: P9.10 14.111,73.8 14.111,70.954 22.622,62.442 23.067,62.442 25.527,59.982 Q10.3
COL7: P9.9 Q9.3 | length 29.9
  Bottom Layer w0.254: P9.9 14.111,76.34 14.111,75.295 22.622,66.783 23.067,66.783 25.527,64.323 Q9.3
CS: P6.13 U1.13 U2.CS | length 92.5
  Top Layer w0.254: U1.13 P6.13@41.783,138.176
  Bottom Layer w0.254: P6.13 42.795,139.065 100.33,139.065 117.602,121.793 U2.CS
D1: J2.22 R21.2 U7.14 | length 59.4
  Top Layer w0.254: U7.14 97.282,41.844 97.282,47.244 97.917,47.879 R21.2
  Bottom Layer w0.254: R21.2@100.838,47.879 R21.2 100.889,47.676 100.838,47.625 101.143,47.625 106.096,42.672 138.049,42.672 J2.22
D2: J2.30 R29.2 U8.14 | length 53
  Top Layer w0.254: U8.14 100.142,22.352 R29.2
  Bottom Layer w0.254: R29.2 107.442,22.352 111.379,18.415 133.477,18.415 135.763,16.129 141.859,16.129 141.986,16.002 142.751,16.002 143.386,16.637 J2.30
E1: J2.23 R22.2 U7.3 | length 64.2
  Top Layer w0.254: R22.2 101.939,34.883 108.077,41.021 137.16,41.021 J2.23
  Bottom Layer w0.254: U7.3 93.656,34.106 100.112,34.106 R22.2
E2: J2.31 R30.2 U8.3 | length 63.9
  Top Layer w0.254: U8.3 91.694,13.716 91.694,11.684 94.164,9.214 97.692,9.214 98.13,9.652 R30.2
  Bottom Layer w0.254: R30.2 101.092,9.652 101.092,9.855 106.35,15.113 142.748,15.113 J2.31
F1: J2.24 R23.2 U7.4 | length 63.9
  Top Layer w0.254: R23.2 116.891,39.751 136.017,39.751 143.764,32.004 J2.24
  Bottom Layer w0.254: U7.4 91.624,33.598 111.068,33.598 111.379,33.909 111.379,34.167 112.023,34.811 R23.2
F2: J2.32 R31.2 U8.4 | length 62.3
  Top Layer w0.254: U8.4 87.63,15.03 93.969,8.691 108.894,8.691 109.855,9.652 R31.2
  Bottom Layer w0.254: R31.2 112.196,9.825 112.949,9.825 117.221,14.097 141.224,14.097 J2.32
G1: J2.25 R24.2 U7.5 | length 65.6
  Top Layer w0.254: R24.2 123.156,34.832 123.19,34.798 123.19,34.916 127.009,38.735 135.711,38.735 140.843,33.603 140.843,32.258 J2.25
  Bottom Layer w0.254: U7.5 91.256,31.426 100.447,31.426 100.491,31.382 119.655,31.382 R24.2
G2: J2.33 R32.2 U8.5 | length 63.8
  Top Layer w0.254: U8.5 88.773,12.7 95.322,6.151 119.655,6.151 R32.2
  Bottom Layer w0.254: R32.2 123.322,9.817 124.117,9.817 127.889,13.589 139.192,13.589 J2.33
GND: C1.2 C2.2 C3.2 C4.2 C5.2 C6.2 J1.4 P1.3 P1.4 P2.3 P2.4 P3.3 P3.4 P4.3 P4.4 P5.5 P6.4 P7.2 P8.2 P8.4 pad.5@67,2 pad.5@85.5,2 Q9.1 Q10.1 Q11.1 Q12.1 Q13.1 Q14.1 Q15.1 Q16.1 R1.1 R18.1 R19.1 R20.1 R21.1 R22.1 R23.1 R24.1 R25.1 R26.1 R27.1 R28.1 R29.1 R30.1 R31.1 R32.1 R33.1 SW1.3 SW1.4 U1.4 U1.29 U2.GND U3.8 U3.13 U4.8 U4.13 U5.8 U5.13 U6.8 U6.13 U7.8 U7.15 U8.8 U8.10 U8.15 | length 25.4
  Top Layer w0.254: P7.2 U1.29 ; U1.4 P6.4@41.783,115.316 ; pad.5@67,2 67.178,1.822 68.499,1.822 69.452,0.869 73.869,0.869 P1.4 ; P1.3 77.54,1.708 78.379,0.869 84.369,0.869 pad.5@85.5,2
H1: J2.26 R25.2 U7.6 | length 62.7
  Top Layer w0.254: R25.2 135.805,34.883 143.764,26.924 J2.26
  Bottom Layer w0.254: U7.6 89.224,30.918 100.236,30.918 100.674,30.48 130.683,30.48 134.125,33.922 134.125,34.717 R25.2
H2: J2.34 R33.2 U8.6 | length 62.6
  Top Layer w0.254: U8.6 94.107,3.683 128.321,3.683 R33.2
  Bottom Layer w0.254: R33.2 140.589,9.652 J2.34
I2C_CLK: P1.2 P2.2 P3.2 P4.2 P6.9 U1.9 | length 395.7
  Top Layer w0.254: P3.2 3.131,88.029 3.131,85.712 2.084,84.665 1.905,84.665 1.905,4.064 4.302,1.667 63.262,1.667 66.294,4.699 77.381,4.699 P1.2 ; U1.9 41.783,128.016 P6.9@41.787,128.02 ; P6.9 P6.9@41.787,128.02 ; v1(55.372,128.143) 55.31,128.081 41.848,128.081 P6.9@41.787,128.02 ; v1(70.231,137.922) v1(70.231,140.081) ; v1(70.358,132.588) 79.375,123.571 v1(81.026,123.571) ; v1(72.136,144.907) 78.867,144.907 80.08,146.12 P2.2
  Bottom Layer w0.254: P3.2 1.663,89.16 1.086,89.736 0.942,89.736 0.762,89.916 0.762,100.562 1.651,101.451 1.651,112.097 6.394,116.84 14.732,116.84 16.883,118.991 28.694,118.991 37.719,128.016 U1.9 ; v1(55.372,128.143) 61.468,128.143 61.49,128.121 70.231,136.862 v1(70.231,137.922) 70.294,137.858 70.294,132.651 v1(70.358,132.588) ; v1@70.04,140.272 v1(70.231,140.081) 70.231,143.002 v1(72.136,144.907) ; v1(81.026,123.571) 83.947,123.571 102.108,105.41 132.461,105.41 145.796,92.075 145.796,87.364 P4.2
I2C_DAT: P1.5 P2.5 P3.5 P4.5 P6.8 U1.8 | length 372.5
  Top Layer w0.254: P3.5 0.869,95.649 0.869,84.983 1.27,84.582 1.27,3.556 3.81,1.016 63.329,1.016 65.869,3.556 70.904,3.556 P1.5 ; U1.8 P6.8@41.783,125.476 ; P6.8 41.787,125.48 41.912,125.605 55.247,125.605 v1(55.372,125.73) ; v1(77.089,138.049) v1(77.089,140.335)
  Bottom Layer w0.254: P3.5 3.131,97.911 3.131,111.677 2.54,112.268 6.35,116.078 15.367,116.078 16.01,116.721 29.091,116.721 U1.8 ; v1(55.372,125.73) 67.437,125.73 77.089,135.382 v1(77.089,138.049) 104.775,110.363 130.417,110.363 P4.5 ; P2.5 77.089,143.371 77.089,140.525 77.184,140.43 v1(77.089,140.335)
LED_REG_CHAIN1: U4.9 U6.14 | length 11.9
  Bottom Layer w0.254: U4.9 53.086,77.089 53.086,70.253 52.429,69.596 U6.14
LED_REG_CLK: P6.5 U1.5 U4.11 U6.11 | length 68
  Top Layer w0.254: U1.5 P6.5@41.783,117.856
  Bottom Layer w0.254: P6.5 46.355,113.415 46.355,108.077 51.562,102.87 51.562,100.33 49.022,97.79 49.022,86.233 50.208,85.047 U4.11 53.848,81.407 53.848,64.643 U6.11
LED_REG_DAT: P6.7 U1.7 U4.14 | length 40.1
  Top Layer w0.254: U1.7 P6.7@41.783,122.936
  Bottom Layer w0.254: P6.7 41.91,122.936 41.914,122.936 47.498,117.352 47.498,108.585 52.578,103.505 52.578,93.345 U4.14
LED_REG_LTCH: P6.6 U1.6 U4.12 U6.12 | length 70.2
  Top Layer w0.254: U1.6 P6.6@41.783,120.396 ; U6.12 53.467,64.516 v1(54.864,65.913)
  Bottom Layer w0.254: P6.6 46.99,115.32 46.99,108.375 52.07,103.295 52.07,99.949 49.53,97.409 49.53,88.265 U4.12 54.864,82.931 v1(54.864,65.913)
MISO: P6.15 U1.15 U2.DO | length 91.2
  Top Layer w0.254: U1.15 41.783,143.256 41.787,143.26 P6.15 94.992,143.26 112.522,125.73 U2.DO
MOSI: P6.14 U1.14 U2.DI | length 89.7
  Top Layer w0.254: U1.14 P6.14@41.783,140.716 ; P6.14 67.862,140.72 68.493,141.351 93.599,141.351 v1(108.204,126.746)
  Bottom Layer w0.254: v1(108.204,126.746) 115.062,119.888 U2.DI
NetD1_1: D1.1 R1.2 | length 8.1
  Top Layer w0.254: D1.1 11.43,143.256 R1.2
NetD2_1: D2.1 Q19.2 R35.2 | length 16.8
  Top Layer w0.254: R35.2 138.501,110.871 144.907,110.871 145.923,111.887 ; Q19.2 145.923,111.887 ; D2.1 145.923,108.579 145.923,111.887
NetQ18_2: Q18.2 Q19.3 R34.2 | length 21
  Top Layer w0.254: Q18.2 140.589,114.038 141.613,115.062 146.155,115.062 147.193,114.024 Q19.3
  Bottom Layer w0.254: R34.2 130.606,114.56 137.014,114.56 137.373,114.919 139.708,114.919 140.589,114.038 Q18.2
R0: Q1.2 R2.2 | length 8.7
  Top Layer w0.254: Q1.2 24.257,99.052 25.138,99.933 27.848,99.933 28.213,99.568 R2.2
R1: Q2.2 R3.2 | length 9.1
  Top Layer w0.254: Q2.2 24.257,94.711 26.235,96.689 R3.2 R3.2@31.848,96.774
R2: Q3.2 R4.2 | length 9.6
  Top Layer w0.254: Q3.2 24.257,90.37 27.698,93.811 R4.2
R3: Q4.2 R5.2 | length 10.2
  Top Layer w0.254: Q4.2 24.257,86.029 26.728,88.5 29.501,88.5 R5.2
R4: Q5.2 R6.2 | length 10.8
  Top Layer w0.254: Q5.2 24.257,81.688 27.46,84.89 28.77,84.89 R6.2
R5: Q6.2 R7.2 | length 11.5
  Top Layer w0.254: Q6.2 24.257,77.423 31.933,85.099 R7.2
R6: Q7.2 R8.2 | length 13.4
  Top Layer w0.254: Q7.2 24.257,73.886 25.836,75.466 25.892,75.466 28.816,78.39 28.816,79.179 R8.2 R8.2@31.933,81.933
R7: Q8.2 R9.2 | length 14.5
  Top Layer w0.254: Q8.2 24.257,69.545 25.836,71.124 25.892,71.124 28.816,74.049 28.816,76.301 R9.2
RESET: P6.3 SW1.1 SW1.2 U1.3 | length 44.1
  Top Layer w0.254: SW1.1 SW1.2 15.999,132.135 18.713,129.421 22.806,129.421 30.206,122.021 30.206,120.416 U1.3 P6.3@41.783,112.776
ROW0: P9.1 Q1.1 | length 20.5
  Top Layer w0.254: P9.1 11.206,105.41 17.691,98.925 22.642,98.925 22.987,98.58 Q1.1
ROW1: P9.2 Q2.1 | length 21.4
  Top Layer w0.254: P9.2 5.599,103.108 6.334,103.108 15.232,94.211 Q2.1
ROW2: P9.3 Q3.1 | length 22
  Top Layer w0.254: P9.3 15.821,89.87 Q3.1
ROW3: P9.4 Q4.1 | length 22.7
  Top Layer w0.254: P9.4 17.622,85.529 Q4.1
ROW4: P9.5 Q5.1 | length 23.5
  Top Layer w0.254: P9.5 19.423,81.188 Q5.1
ROW5: P9.6 Q6.1 | length 24.2
  Top Layer w0.254: P9.6 5.599,92.472 6.453,92.472 21.705,77.22 22.642,77.22 22.987,76.875 Q6.1
ROW6: P9.7 Q7.1 | length 25.5
  Top Layer w0.254: P9.7@5.547,89.984 P9.7 5.621,90.17 6.291,89.5 6.492,89.5 22.987,73.005 Q7.1
ROW7: P9.8 Q8.1 | length 26.8
  Top Layer w0.254: P9.8 14.222,78.769 14.222,77.43 22.86,68.791 22.86,68.326 22.987,68.199 Q8.1
RX: J1.3 P6.2 U1.2 | length 18.1
  Top Layer w0.254: U1.2 P6.2@41.783,110.236 ; P6.2 44.7,113.03 52.451,113.03 J1.3
SCK: P7.15 U1.16 U2.CLK | length 103
  Top Layer w0.254: P7.15 U1.16 28.956,136.906 91.44,136.906 109.982,118.364 U2.CLK
SEN_C1: J2.21 R20.2 U7.13 | length 56.2
  Top Layer w0.254: U7.13 105.857,47.879 R20.2
  Bottom Layer w0.254: R20.2 117.018,43.18 140.462,43.18 142.17,41.472 142.17,41.091 J2.21
SEN_C2: J2.29 R28.2 U8.13 | length 53.8
  Top Layer w0.254: U8.13 98.11,17.78 105.41,17.78 109.728,22.098 R28.2
  Bottom Layer w0.254: R28.2 122.085,22.098 123.664,20.519 132.389,20.519 135.636,17.272 141.859,17.272 J2.29
SENS_REG_CHAIN1: U3.9 U5.14 | length 14.7
  Bottom Layer w0.254: U3.9 87.63,86.807 87.63,77.978 U5.14
SENS_ROW0: J2.3 U3.15 | length 66.2
  Top Layer w0.254: U3.15 124.714,104.267 J2.3
SENS_ROW1: J2.4 U3.1 | length 76.5
  Top Layer w0.254: U3.1 77.343,106.68 77.654,106.369 80.702,106.369 83.947,103.124 123.317,103.124 J2.4
SENS_ROW2: J2.5 U3.2 | length 76.3
  Top Layer w0.254: U3.2 80.129,104.267 83.939,100.457 123.444,100.457 J2.5
SENS_ROW3: J2.6 U3.3 | length 76.3
  Top Layer w0.254: U3.3 80.137,101.727 84.074,97.79 123.571,97.79 J2.6
SENS_ROW4: J2.7 U3.4 | length 76.6
  Top Layer w0.254: U3.4 77.47,99.441 77.724,99.187 80.391,99.187 84.201,95.377 123.444,95.377 J2.7
SENS_ROW5: J2.8 U3.5 | length 76.3
  Top Layer w0.254: U3.5 81.28,92.837 123.444,92.837 J2.8
SENS_ROW6: J2.9 U3.6 | length 76.4
  Top Layer w0.254: U3.6 77.47,93.853 77.724,93.853 81.153,90.424 123.317,90.424 J2.9
SENS_ROW7: J2.10 U3.7 | length 76.3
  Top Layer w0.254: U3.7 78.486,91.567 83.439,86.614 124.587,86.614 J2.10
SENS_ROW8: J2.11 U5.15 | length 63.7
  Top Layer w0.254: U5.15 95.885,78.613 96.393,78.105 130.596,78.105 138.158,70.542 138.158,70.503 J2.11
SENS_ROW9: J2.12 U5.1 | length 73.8
  Top Layer w0.254: U5.1 80.26,81.153 83.943,77.47 88.646,77.47 89.408,76.708 129.413,76.708 J2.12
SENS_ROW10: J2.13 U5.2 | length 74
  Top Layer w0.254: U5.2 79.883,78.613 83.82,74.676 84.131,74.987 128.594,74.987 J2.13
SENS_ROW11: J2.14 U5.3 | length 74.5
  Top Layer w0.254: U5.3 80.137,76.073 82.677,73.533 84.387,73.533 85.333,74.479 86.117,74.479 87.063,73.533 127.508,73.533 J2.14
SENS_ROW12: J2.15 U5.4 | length 73.8
  Top Layer w0.254: U5.4 81.28,73.533 85.09,69.723 128.778,69.723 J2.15
SENS_ROW13: J2.16 U5.5 | length 73.8
  Top Layer w0.254: U5.5 81.026,70.993 84.709,67.31 128.651,67.31 J2.16
SENS_ROW14: J2.17 U5.6 | length 73.9
  Top Layer w0.254: U5.6 77.851,68.453 77.978,68.58 78.105,68.453 80.772,68.453 84.582,64.643 128.778,64.643 J2.17
SENS_ROW15: J2.18 U5.7 | length 73.8
  Top Layer w0.254: U5.7 81.153,65.913 85.852,61.214 129.667,61.214 J2.18
SENS_ROW_CLK: P7.10 U1.21 U3.11 U5.11 | length 117.4
  Top Layer w0.254: P7.10 U1.21 36.241,130.556 37.511,129.286 61.849,129.286 79.629,111.506 v1(79.629,111.379)
  Bottom Layer w0.254: v1(79.629,111.379) 79.629,99.888 U3.11 81.153,89.85 81.153,73.025 84.551,69.627 U5.11
SENS_ROW_DAT: P7.11 U1.20 U3.14 | length 83.1
  Top Layer w0.254: P7.11 U1.20 36.241,133.096 37.638,131.699 61.976,131.699 v1(82.677,110.998)
  Bottom Layer w0.254: v1(82.677,110.998) 82.677,104.46 U3.14
SENS_ROW_LTCH: P7.12 U1.19 U3.12 U5.12 | length 119.8
  Top Layer w0.254: P7.12 U1.19 36.241,135.636 37.646,134.231 62.238,134.231 v1(81.026,115.443)
  Bottom Layer w0.254: v1(81.026,115.443) 81.026,101.031 U3.12 89.408,92.649 89.408,74.422 86.582,71.596 86.46,71.596 85.857,70.993 U5.12
SNR_REG_CHAIN: U7.10 U8.9 | length 26.5
  Bottom Layer w0.254: U8.9 96.516,6.026 96.516,23.252 94.624,25.144 94.624,27.915 95.57,28.861 U7.10
SNR_REG_CLK: P6.11 U1.11 U7.2 U8.2 | length 148.7
  Top Layer w0.254: U1.11 37.848,133.098 41.781,133.098 P6.11@41.783,133.096 ; v1(84.455,36.576) 84.455,38.295 87.63,41.47 U7.2
  Bottom Layer w0.254: P6.11 69.215,105.795 69.215,43.329 69.872,42.672 U7.2 ; v1(84.455,36.576) 84.455,23.495 U8.2
SNR_REG_LOAD: P6.10 U1.10 U7.1 U8.1 | length 146.4
  Top Layer w0.254: U1.10 37.848,130.558 41.781,130.558 P6.10@41.783,130.556 ; v1(66.802,47.244) 66.929,47.117 76.2,47.117 v1(76.327,46.99) ; U7.1 91.694,41.148 v1(91.694,29.083)
  Bottom Layer w0.254: P6.10 60.394,112.076 60.394,111.173 66.665,104.902 66.665,47.381 v1(66.802,47.244) ; v1(76.327,46.99) 86.487,46.99 87.192,46.285 87.192,45.65 U7.1 ; U8.1 89.408,22.86 91.694,25.146 v1(91.694,29.083)
SNR_REG_SER_OUT: P6.12 U1.12 U7.9 | length 138.7
  Top Layer w0.254: U1.12 37.848,135.638 41.781,135.638 P6.12@41.783,135.636 ; v1(70.485,45.085) 86.544,29.026 87.374,29.026 88.968,27.432 U7.9
  Bottom Layer w0.254: P6.12 70.485,107.065 v1(70.485,45.085)
TX: J1.2 P6.1 U1.1 | length 16.6
  Top Layer w0.254: U1.1 41.656,107.696 P6.1@41.91,107.442 ; P6.1@41.66,107.7 P6.1 46.547,112.337 50.604,112.337 J1.2
VCC: C1.1 C2.1 C3.1 C4.1 C5.1 C6.1 D1.2 J1.5 P1.1 P1.6 P2.1 P2.6 P3.1 P3.6 P4.1 P4.6 P5.6 P7.1 P8.1 P8.3 Q1.3 Q2.3 Q3.3 Q4.3 Q5.3 Q6.3 Q7.3 Q8.3 U1.30 U2.5V U3.10 U3.16 U4.10 U4.16 U5.10 U5.16 U6.10 U6.16 U7.16 U8.16 | length 75.6
  Top Layer w0.254: P7.1 U1.30 ; U4.16 51.137,96.818 57.829,96.818 C2.1 ; U6.16 51.225,74.72 57.868,74.72 C4.1 ; C3.1 73.619,82.469 73.619,82.89 74.549,83.82 83.058,83.82 U5.16 ; C1.1 74.401,108.778 83.439,108.778 U3.16 ; C5.1 84.699,45.426 85.431,46.158 94.624,46.158 U7.16 ; C6.1 85.207,22.947 86.066,23.806 94.624,23.806 U8.16
Vin: J2.1 P5.1 pad.5@2.5,148 pad.5@147.5,148 | length 207.9
  Top Layer w0.254: pad.5@2.5,148 3.725,149.225 136.398,149.225 P5.1 ; J2.1 143.764,93.726 148.971,98.933 148.971,136.271 145.034,140.208 145.034,140.589 P5.1 ; pad.5@147.5,148 143.506,144.006 142.863,144.006 P5.1
pads on no net: J1.1 J1.6 R18.3 R19.3 R20.3 R21.3 R22.3 R23.3 R24.3 R25.3 R26.3 R27.3 R28.3 R29.3 R30.3 R31.3 R32.3 R33.3 U1. U2. U2.3V U2.CD U5.9 U6.9 U7.7 U8.7
copper on no net: | length 20.3
  Bottom Layer w0.254: 6.858,117.348 11.938,117.348 11.938,122.428 6.858,122.428 6.858,117.348

## Polygon pours and split planes (outlines as drawn)
VCC on Plane(VCC) (split plane): 149.49,0.51 0.51,0.51 0.51,149.49 149.49,149.49
GND on Plane(GROUND) (split plane): 149.49,0.51 0.51,0.51 0.51,149.49 149.49,149.49

## Silkscreen, mask and mechanical layers (free items; w line width, h text height)
Top Overlay:
  lines w0.254: 47.752,110.236 47.752,146.431 63.627,146.431 63.627,110.236 47.752,110.236 ; 88.319,56.474 139.319,56.474 139.319,109.474 88.319,109.474 88.319,56.474 ; 127.891,120.161 143.891,120.161 143.891,145.161 127.891,145.161 127.891,120.161
Border:
  lines w0.1: 0,122.809 0,126.619
  lines w0.254: 0,0 150,0 150,150 0,150 0,0

## Text inside footprints (layer, text, board x,y; h text height)
P8: Top Overlay "1" at 6.096,118.11 h1.27; Top Overlay "2" at 5.588,120.65 h1.27; Top Overlay "4" at 12.192,120.65 h1.27; Top Overlay "3" at 12.192,118.11 h1.27
Q18: Top Overlay "1" at 140.034,115.813 h1.5 r90; Top Overlay "3" at 142.552,115.813 h1.5 r90
Q19: Top Overlay "1" at 145.368,115.686 h1.5 r90; Top Overlay "3" at 147.886,115.686 h1.5 r90